# Altium PCB Amp_1watt_30MHz_2700MHz.PcbDoc
Units mm, origin at the board's own origin, x right, y up, seen from the top; angles counter-clockwise.
Board outline 34.14 x 16.76 mm, 2 copper layers (Top Layer, Bottom Layer), stack 0.871 mm thick; 9 components, 9 nets, 30 pads, 58 vias.
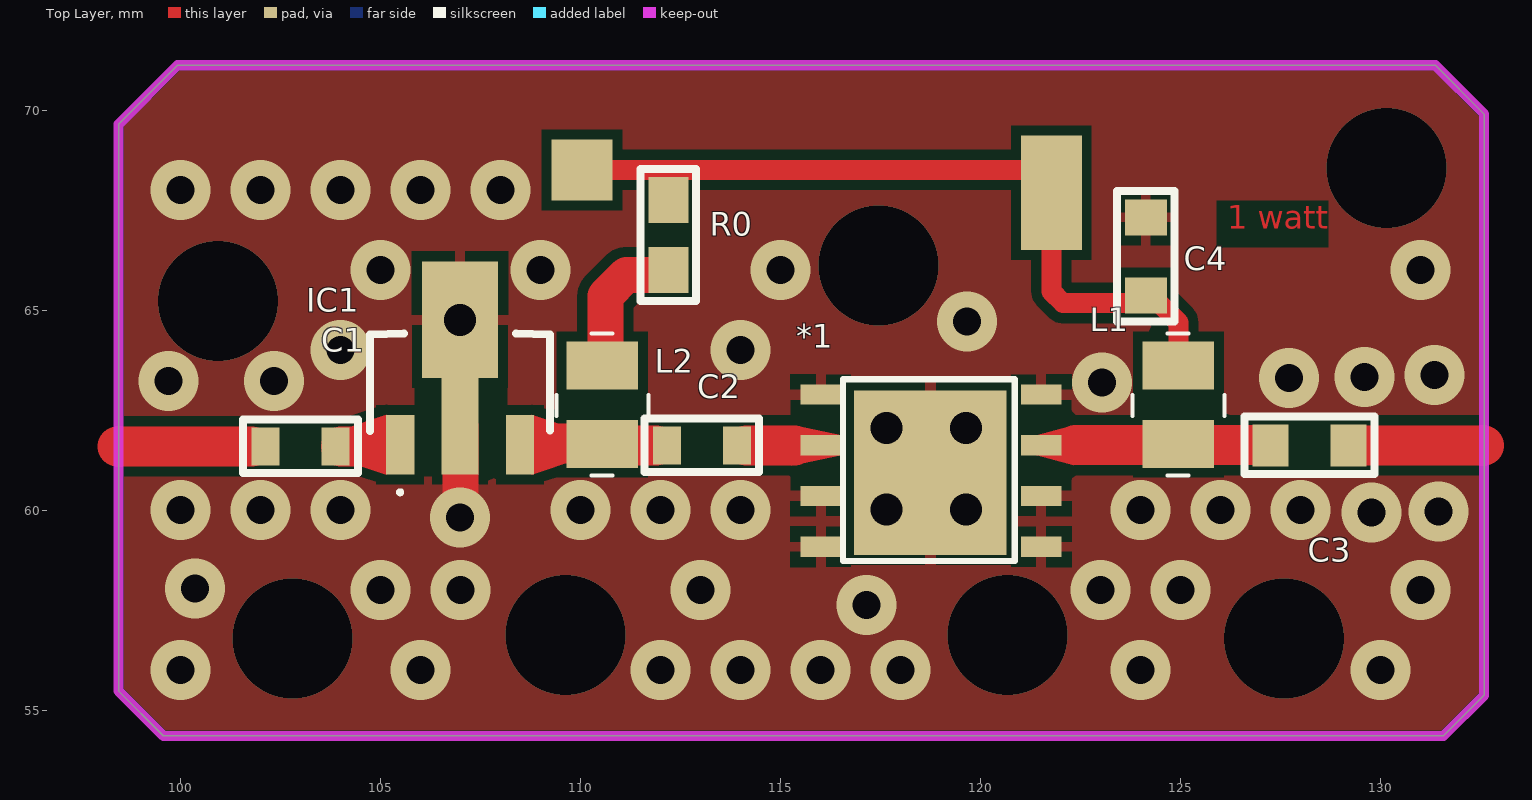
[diagram p0: Top Layer view]
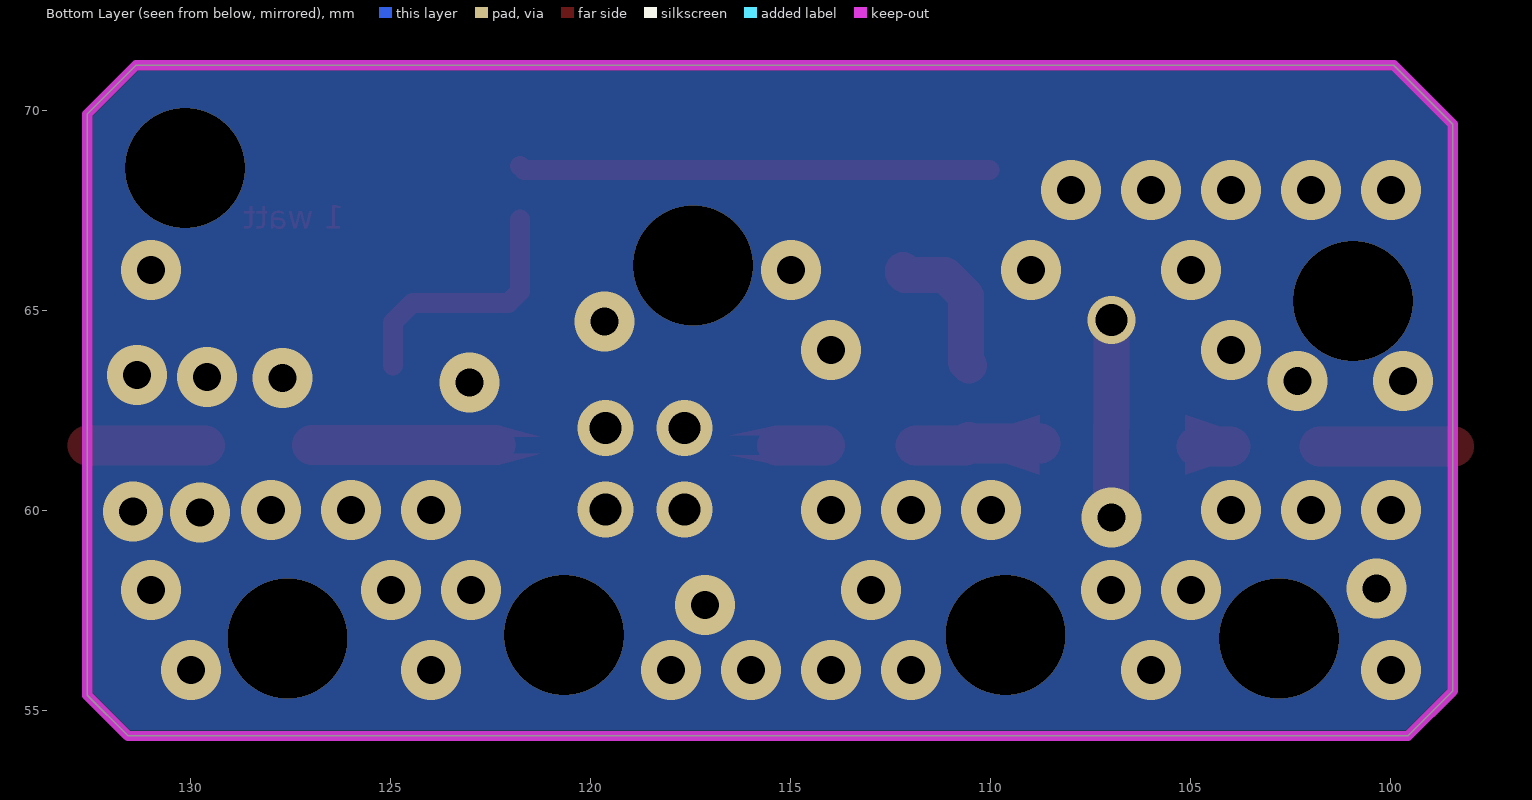
[diagram p1: Bottom Layer view, seen from below]
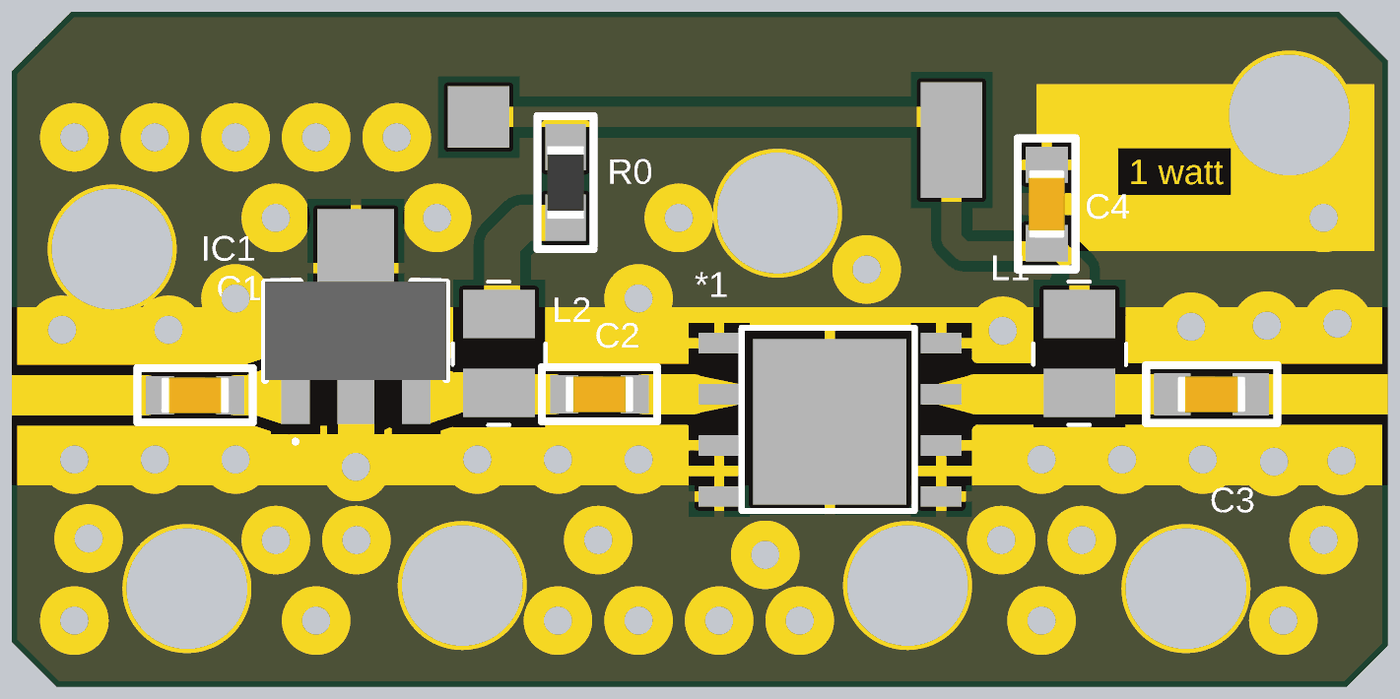
[diagram p2: 3D render of the assembled board from above, using the file's embedded part models]

## Layer stack, top to bottom
Top Solder: solder mask 0.0102, Solder Resist, Dk 3.5
Top Layer: signal copper 0.0356
Dielectric 1: dielectric 0.8, FR-4, Dk 4.6
Bottom Layer: signal copper 0.0356
Bottom Solder: solder mask 0.0102, Solder Resist, Dk 3.5

## Board outline
98.45,55.474 98.45,69.647 99.924,71.12 131.369,71.12 132.588,69.901 132.588,55.372 131.572,54.356 99.568,54.356

## Design rules (kind name [scope] priority, off if disabled: settings)
Clearance Clearance_3 [InNet('GND') vs OnLayer('Keep-Out Layer')] p1: gap=0 ignorepadtopadclearanceinfootprint=FALSE
Clearance Clearance_2 [OnLayer('Keep-Out Layer') vs InNet('RF_IN')] p2: gap=0 ignorepadtopadclearanceinfootprint=FALSE
Clearance Clearance_1 [OnLayer('Keep-Out Layer') vs InNet('RF_OUT')] p3: gap=0 ignorepadtopadclearanceinfootprint=FALSE
Clearance [All] p4: gap=0.254 ignorepadtopadclearanceinfootprint=FALSE except(0: Arc-Hole Track-Hole SMDPad-Hole THPad-Hole Via-Hole Fill-Hole Poly-Hole Region-Hole Text-Hole)
PolygonConnect [All] p1: thpad.connectstyle=Direct thpad.reliefconductorwidth=0.254 thpad.reliefentries=4 thpad.polygonreliefangle="90 Angle" thpad.airgapwidth=0.254 smdpad.connectstyle=Relief smdpad.reliefconductorwidth=0.254 smdpad.reliefentries=4 smdpad.polygonreliefangle="90 Angle" smdpad.airgapwidth=0.254 via.connectstyle=Direct via.reliefconductorwidth=0.254 via.reliefentries=4 via.polygonreliefangle="90 Angle" via.airgapwidth=0.254
RoutingVias [All] p1: holewidth=0.711 width=1.27 viastyle="Through Hole" minholewidth=0.711 minwidth=1.27 maxholewidth=0.711 maxwidth=1.27
SolderMaskExpansion [All] p1: expansion=0.102 istentingtop=FALSE
Width [All] p1: maxlimit=1.2 minlimit=0.254 preferedwidth=1
30 further rules are at their usual default settings.

## Classes and differential pairs
net class RF: Net*1_6 NetC1_2 RF_IN RF_OUT

## Components (designator, comment, footprint, x,y, rotation, side; value= is the part's Value field where it differs from the comment)
*1 "PHA-202+" PHA-202+ 118.745,60.935 r0 top
C1 "82pf" CAPC0603X08N 102.997,61.595 r0 top
C2 "82pf" CAPC0603X08N 113.03,61.62 r0 top
C3 "82pf" CAPC0603X08M 128.219,61.62 r0 top
C4 "82pf" CAPC0603X08M 124.13,66.345 r90 top
IC1 "GALI-84+PR" GALI5 106.985,63.195 r0 top
L1 "58nH" INDC0805X142-2M 124.943,62.636 r90 top
L2 "58nH" INDC0805X142-2M 110.541,62.636 r90 top
R0 "62" RESC0603X04M 112.192,66.878 r90 top

## Footprints (in the part's own frame and the unit in brackets; to place one, negate y for a bottom-side part, rotate by r counter-clockwise, add the part's x,y. Pads: shape width x height; smd on the part's side, far side on the other; paste and mask are expansions set on the pad)
CAPC0603X08M [mm] "Chip Capacitor, 2-Leads, Body 1.60x0.80mm, IPC Low Density"
  rect 0.9x1.05 smd: 1(-0.975,0) 2(0.975,0)
  silkscreen extent -1.63,-0.72 1.63,0.72, body extent -0.85,-0.45 0.85,0.45, height 0.8
CAPC0603X08N [mm] "Chip Capacitor, 2-Leads, Body 1.60x0.80mm, IPC Medium Density"
  rect 0.7x0.95 smd: 1(-0.875,0) 2(0.875,0)
  silkscreen extent -1.43,-0.67 1.43,0.67, body extent -0.85,-0.45 0.85,0.45, height 0.8
GALI5 [mil]
  rect 27.99x59.02 smd: 1(-59.02,-61.5) 3(59.02,-61.5)
  rect 35.98x95 smd: 2(0,-43.5)
  rect 75x115 smd: 4(0,61.5)
  silkscreen extent -89,-110 89,48, body extent -89,-48 89,48, height 67
INDC0805X142-2M [mm]
  rect 1.2x1.78 smd: 1(-0.98,0) 2(0.98,0)
  silkscreen extent -1.78,-1.15 1.78,1.15, body extent -1.04,-0.76 1.04,0.76, height 1.52
PHA-202+ [mil]
  rect 40x20 smd: 0(-108,76.95) 1(-108,27) 2(-108,-23) 3(-108,-72.95) 4(109,-72.95) 5(109,-23) 6(109,27) 7(109,76.95)
  rect 150x162 smd: 8(0,0)
  silkscreen extent -86,-87 83,92
RESC0603X04M [mm] "Chip Resistor, 2-Leads, Body 1.60x0.80mm, IPC Low Density"
  rect 1.15x1 smd: 1(-0.875,0) 2(0.875,0)
  silkscreen extent -1.65,-0.69 1.65,0.7, body extent -0.9,-0.45 0.9,0.45, height 0.45

## Part data
C1 C2 C3 C4: library part Capacitor2P-NP, "The capacitor have 2PIN in AXIAL and SMD models. / all non-polar models include.", Create Date=2022/07/25, Created For=HiroNegarPars, creator="Shahab Azmoodeh", Modified Date=2022/07/25, version=1.0
IC1: "Integrated Circuit", Manufacturer_Name=Mini-Circuits, Datasheet Link=https://4donline.ihs.com/images/VipMasterIC/IC/MINI/MINIS11712/MINIS11712-1.pdf?hkey=EF798316E3902B6ED9A73243A3159BB0, Height=1.6mm, Manufacturer_Part_Number=GALI-84+PR
L1 L2: library part Inductor2P, "generic smd and dip inductors", Create Date=12.09.2022, Created For="Hiro Negar", creator="Milad Mohammadi Bidhandi", Modify Date=13.09.2022, version=1.0
R0: library part Resistor2P, "The resistors have 2PIN in AXIAL and SMD models. / All wattage include in.", Create Date=2022/07/24, Created For=HiroNegarPars, creator="Shahab Azmoodeh", Modified Date=2022/07/24, version=1.0

## Free pads (board coordinates)
  rect 1.524x1.524 smd: 1(110.033,68.504) 1(121.768,67.259) 1(121.768,68.605)

## Via types
v1: diameter 1.5, hole 0.7, Top Layer to Bottom Layer, 46 vias
v2: diameter 3, hole 3, Top Layer to Bottom Layer, 7 vias
v3: diameter 1.4, hole 0.8, Top Layer to Bottom Layer, 4 vias
v4: diameter 1.2, hole 0.8, Top Layer to Bottom Layer, 1 vias

## Nets (pads, with @x,y where several pads share a name; then routed paths per layer and width w, separated by ;. In a path a pad name is that pad's centre, name@x,y a point inside that pad or via, vN(x,y) a via of type N, cw(c..) or ccw(c..) an arc to the next point about the centre after c; other vN are vias at no path point)
12V: C4.1 L1.2 pad.1 R0.2 | length 18.1
  Top Layer w0.5: pad.1@110.033,68.504 121.666,68.504 pad.1@121.768,68.605 ; pad.1@121.768,67.259 121.768,65.469 122.06,65.176 124.46,65.176 124.943,64.694 L1.2
GND: *1.0 *1.2 *1.3 *1.4 *1.5 *1.7 *1.8 C4.2 IC1.2 IC1.4 | length 2.7
  Top Layer w0.9: v4(106.985,64.757) IC1.2 IC1.2@106.992,62.083
  other v1: 100,56 106,56 112,56 114,56 116,56 118,56 124,56 130,56 117.145,57.633 105,58 107,58 113,58 123,58 125,58 131,58 100.355,58.039 106.985,59.817 129.769,59.944 131.445,59.969 100,60 102,60 104,60 110,60 112,60 114,60 124,60 126,60 128,60 123.038,63.195 99.695,63.221 102.337,63.221 127.711,63.297 129.591,63.322 131.343,63.373 104,64 114,64 119.659,64.719 105,66 109,66 115,66 131,66 100,68 102,68 104,68 106,68 108,68
  other v2: 102.794,56.794 127.584,56.794 109.626,56.871 120.675,56.871 100.94,65.227 117.45,66.116 130.15,68.555
  other v3: 117.653,60.02 119.634,60.02 117.653,62.052 119.634,62.052
Net*1_1: *1.1 C2.2 | length 1.2
  Top Layer w1: C2.2@114.148,61.62 115.341,61.62
Net*1_6: *1.6 C3.1 L1.1 | length 4.6
  Top Layer w1: 122.377,61.623 C3.1@126.975,61.623
NetC1_2: C1.2 IC1.1 | length 0.8
  Top Layer w1: C1.2@104.013,61.595 104.851,61.595
NetC2_1: C2.1 IC1.3 L2.1 | length 3.2
  Top Layer w1: IC1.3@108.763,61.67 110.504,61.67 110.541,61.707 110.628,61.62 C2.1@111.887,61.62
NetL2_2: L2.2 R0.1 | length 3.7
  Top Layer w0.9: L2.2 110.617,63.693 110.617,65.351 111.144,65.878 112.142,65.878 112.192,65.928 R0.1
RF_IN: C1.1 | length 3.4
  Top Layer w1: 98.425,61.595 C1.1@101.778,61.595
RF_OUT: C3.2 | length 2.9
  Top Layer w1: C3.2@129.642,61.62 132.588,61.62
copper on no net: | length 1.8
  Top Layer w0.9: 106.992,60.332 106.992,62.083

## Polygon pours and split planes (outlines as drawn)
GND on Bottom Layer "GND_L02_P000" (solid, pour order 0): 98.45,55.474 98.45,69.647 99.924,71.12 131.369,71.12 132.588,69.901 132.588,55.372 131.572,54.356 99.568,54.356
GND on Top Layer "GND_L01_P002" (solid, pour order 2): 98.45,55.474 98.45,69.647 99.924,71.12 131.369,71.12 132.588,69.901 132.588,55.372 131.572,54.356 99.568,54.356

## Keep-outs
Keep-Out Layer:
  lines w0.254: 98.45,55.474 99.568,54.356 131.572,54.356 132.588,55.372 132.588,69.901 131.369,71.12 99.924,71.12 98.45,69.647 98.45,55.829 98.45,55.474

## Other copper
Top Layer:
  pour cut-out: 123.824,62.937 123.824,62.418 126.112,62.418 126.112,62.937
  pour cut-out: 108.179,63.246 107.544,63.246 107.544,62.308 108.179,62.308
  pour cut-out: 109.397,62.911 109.397,62.393 111.685,62.393 111.685,62.911
  pour cut-out: 106.447,63.297 105.842,63.297 105.842,62.359 106.447,62.359
  pour cut-out: 103.501,62.207 102.511,62.207 102.511,61.013 103.501,61.013
  pour cut-out: 113.513,62.332 112.522,62.332 112.522,60.884 113.513,60.884
  region net Net*1_1: 115.264,61.111 116.512,61.368 115.264,61.368
  region net Net*1_1: 115.392,62.103 116.517,61.871 115.392,61.871
  region net NetC2_1: 108.781,62.382 109.721,62.068 108.781,62.068
  region net NetC2_1: 108.782,60.887 109.928,61.269 108.782,61.269
  region net NetC1_2: 105.138,62.383 103.992,62.001 105.138,62.001
  region net Net*1_6: 122.326,61.121 121.27,61.408 122.326,61.408
  region net Net*1_6: 122.326,62.12 121.27,61.832 122.326,61.832
  region net NetC1_2: 105.139,60.888 104.199,61.202 105.139,61.202
  pour cut-out: 106.959,62.354 106.984,62.354 107.134,62.324 107.552,62.324 107.649,62.304 107.731,62.249 107.786,62.167 107.806,62.07 107.806,61.12 107.786,61.023 107.731,60.941 107.649,60.886 107.552,60.866 107.134,60.866 106.984,60.836 106.959,60.836 106.934,60.831 98.425,60.831 98.4,60.836 98.375,60.836 98.18,60.875 98.089,60.913 97.924,61.023 97.853,61.094 97.743,61.259 97.705,61.35 97.666,61.545 97.666,61.645 97.705,61.84 97.743,61.931 97.853,62.096 97.924,62.167 98.089,62.277 98.18,62.315 98.375,62.354 98.4,62.354 98.425,62.359 106.934,62.359
  pour cut-out: 128.702,62.408 127.711,62.408 127.711,60.833 128.702,60.833
  pour cut-out: 108.348,62.324 107.806,62.324 107.806,60.866 108.348,60.866
  text "1 watt" at 126.162,66.838 h1

## Silkscreen, mask and mechanical layers (free items; w line width, h text height)
Top Solder:
  rectangle: 123.876,65.176 132.258,69.317
  rectangle: 98.349,59.36 132.664,63.779